# Allegro board OSC.brd
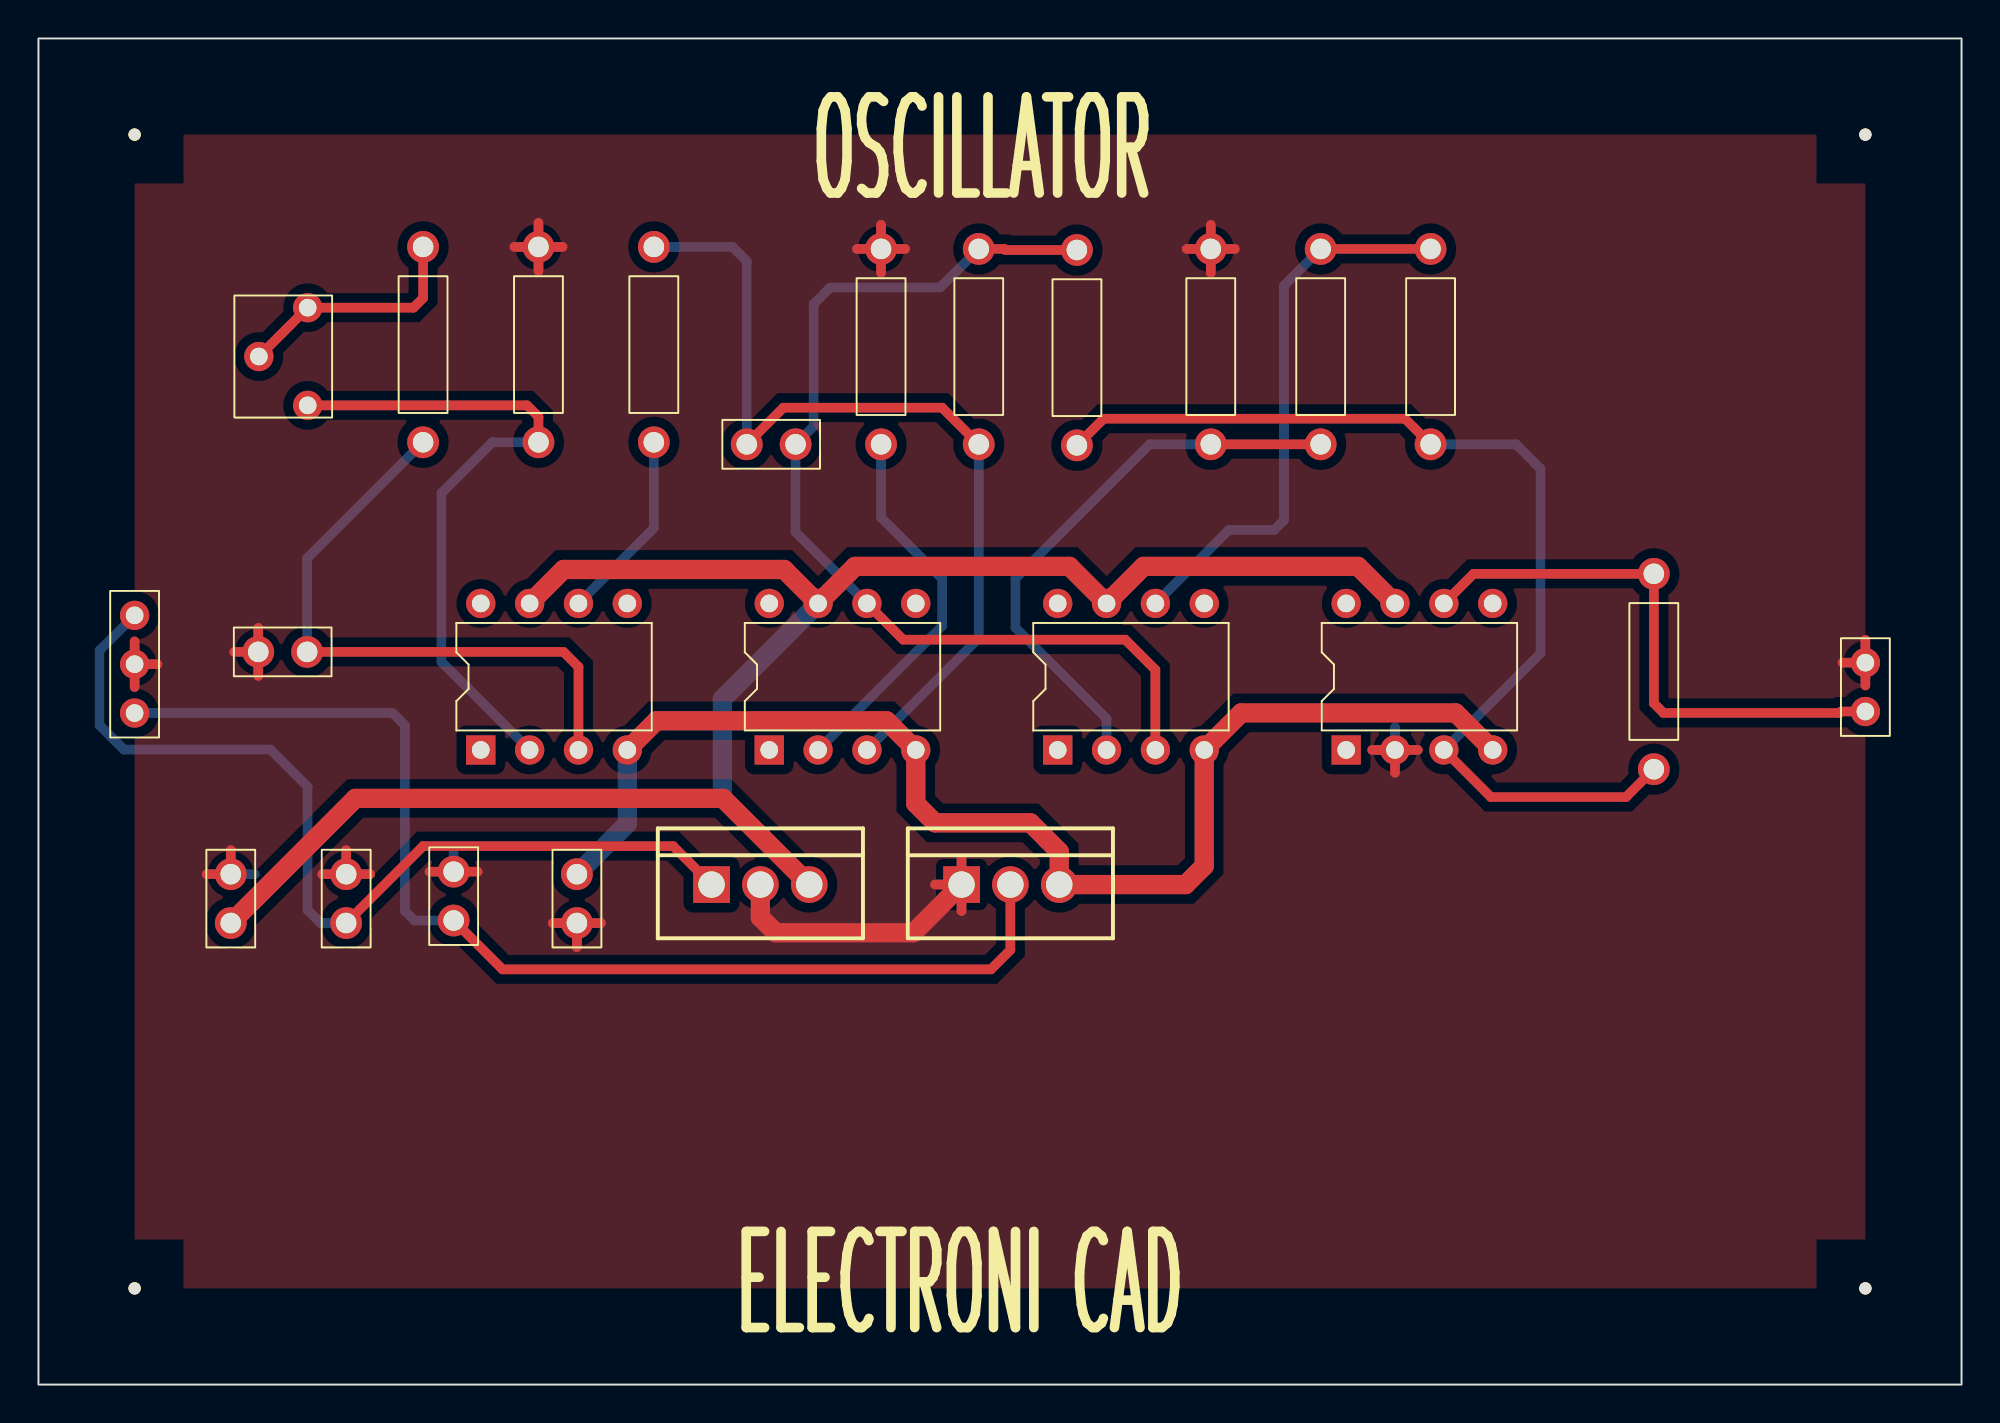
[diagram p0: board, top side]
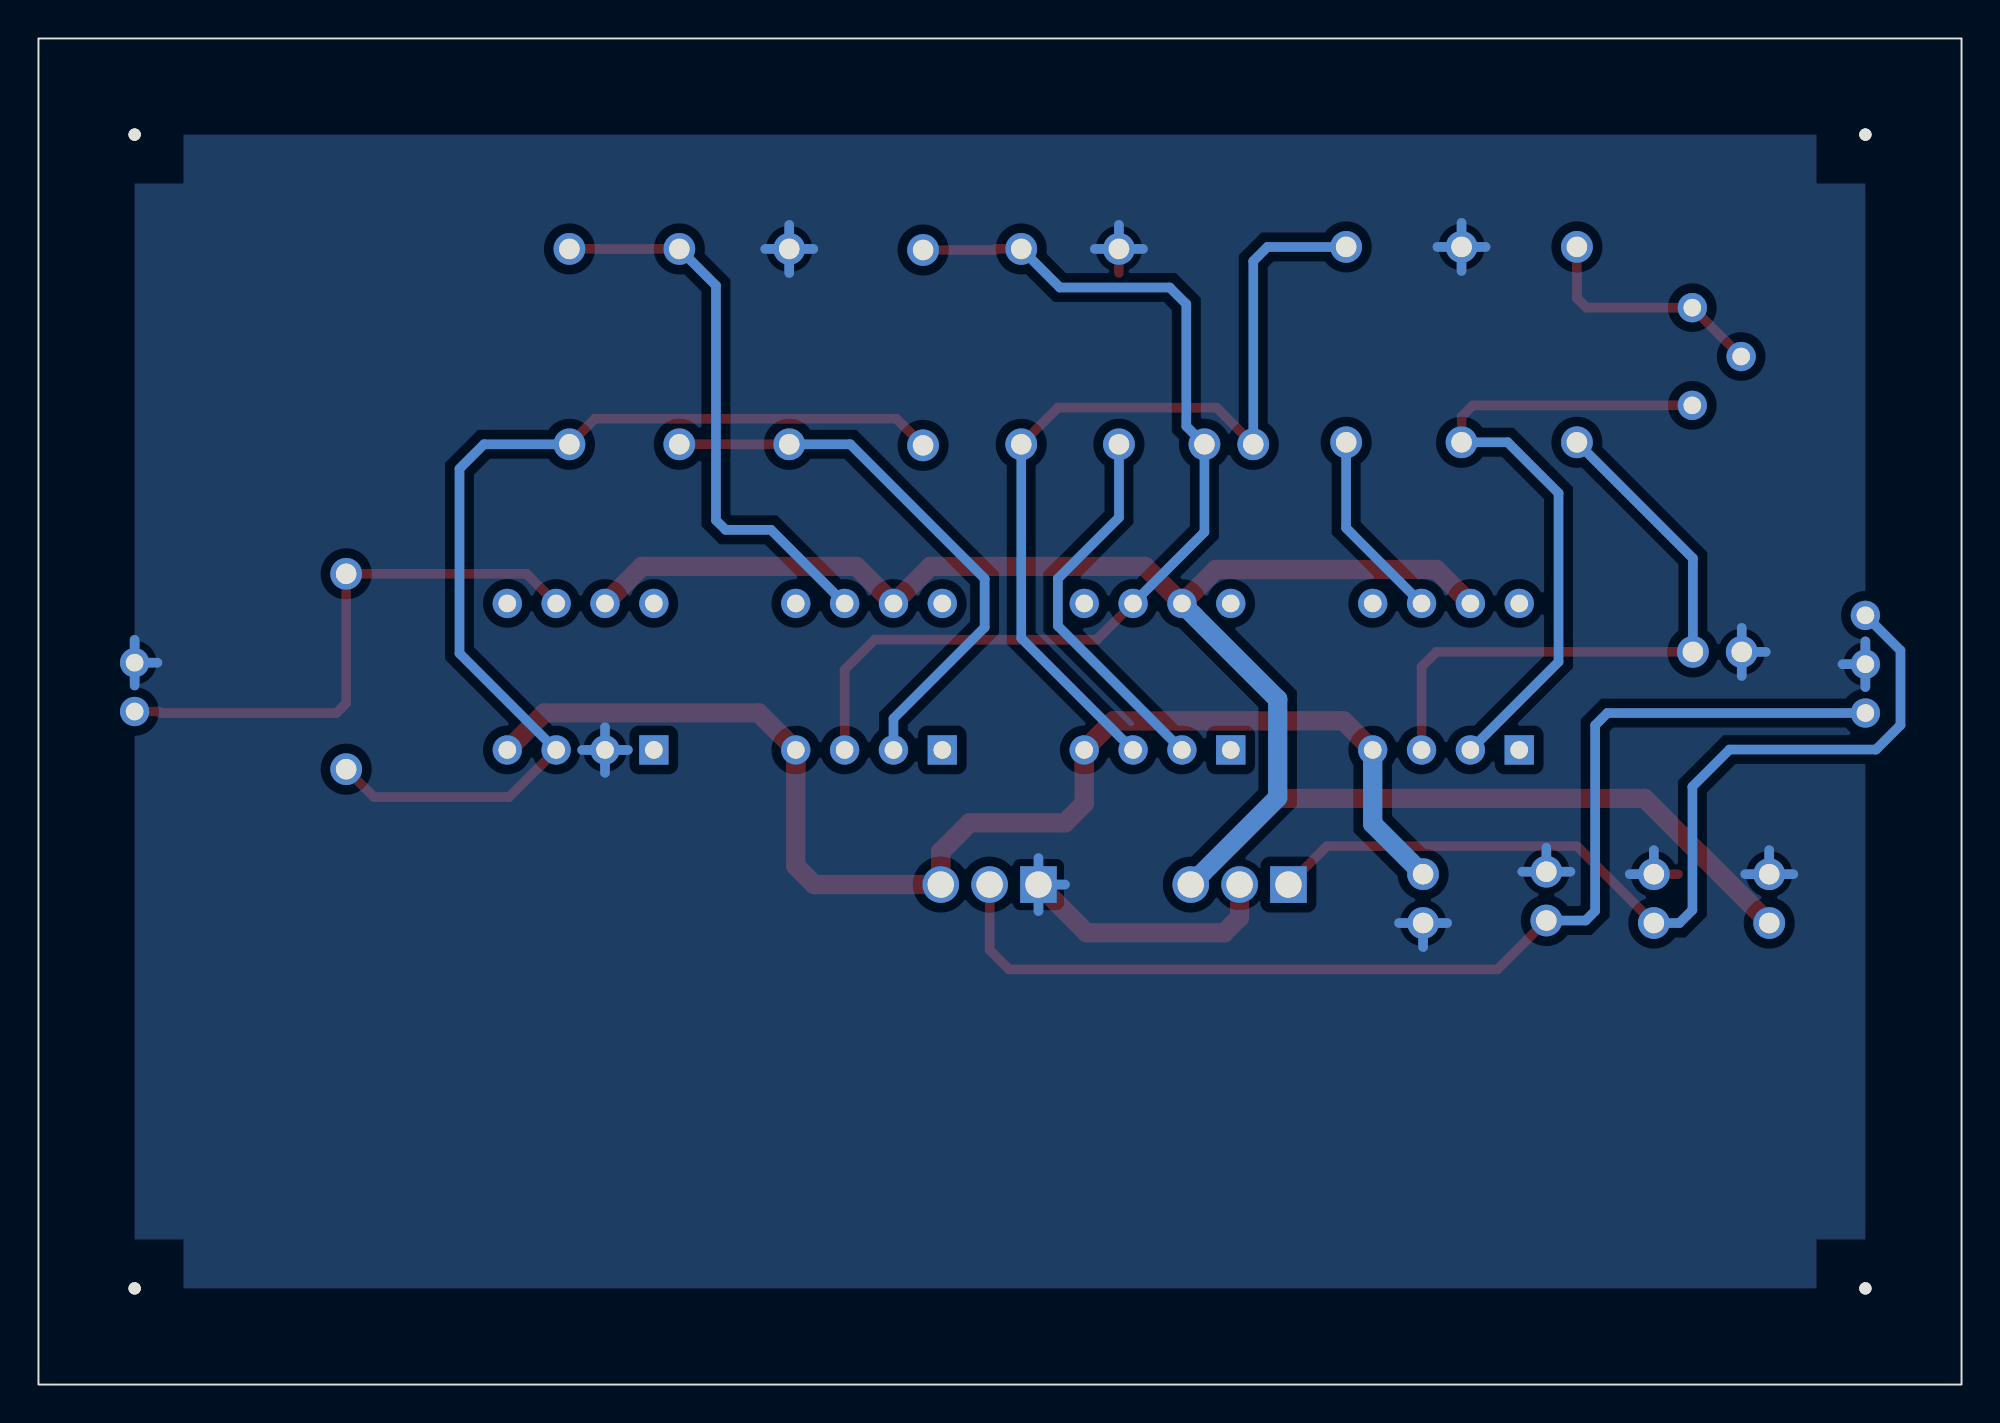
[diagram p1: board, bottom side, seen from below]

Outline 100 x 70 mm; copper layers: TOP, BOTTOM. Coordinates in mm from the lower left corner of the outline.
Outline path: rectangle 0,0 100,70

## Design rules (mm)
constraint set DEFAULT: min track width 0.5
nets with their own width: min track width 1; nets +VCC -VCC GND

## Placement (name value [footprint] x y rotation side)
C1  0.001uF  [CAPCK05]  36.83 48.9 270 top
C2  270pF  [CAPCK05]  13.97 38.1 90 top
C3  0.1uF  [CAPCK05]  16 24 0 top
C4  0.1uF  [CAPCK05]  10 24 0 top
C5  0.1uF  [CAPCK05]  21.59 26.67 180 top
C6  0.1uF  [CAPCK05]  28 24 0 top
J1  CON2  [JUMPER2]  95 35 90 top
J2  CON3  [JUMPER3]  5 40 270 top
NOREF  -  [unnamed]  5 65 0 top
NOREF#2  -  [unnamed]  95 65 0 top
NOREF#3  -  [unnamed]  5 5 0 top
NOREF#4  -  [unnamed]  95 5 0 top
R1  10K  [RES400]  20 49 0 top
R2  100K  [RES400]  48.9 48.9 0 top
R3  10K  [RES400]  54 59 180 top
R4  10K  [RES400]  84 32 0 top
R5  62K  [RES400]  32 49 0 top
R6  10K  [RES400]  43.81 48.9 0 top
R7  10K  [RES400]  72.39 59.05 180 top
R8  10K  [RES400]  26 49 0 top
R9  10K  [RES400]  66.67 48.9 0 top
R10  10K  [RES400]  60.96 48.9 0 top
U1  LF351  [DIP8_3]  23 33 90 top
U2  LF351  [DIP8_3]  38 33 90 top
U3  LF351  [DIP8_3]  53 33 90 top
U4  LF351  [DIP8_3]  68 33 90 top
U5  LM7812/TO  [TO220AB]  35 26 0 top
U6  LM7912C  [TO220AB]  48 26 0 top
VR1  1M  [RESADJ]  14 56 0 top

## Library data of the parts
C1-C6 = CAP NP: Tolerance: ***; User Part Number: ***
J1 = CON2: User Part Number: ***
J2 = CON3: User Part Number: ***
R1-R10 = R: Tolerance: ***; User Part Number: ***
U1-U4 = LF351: Tolerance: ***; User Part Number: ***
U5 = LM7812/TO_5
U6 = LM7912C_2
VR1 = POT: Tolerance: ***; User Part Number: ***

## Footprints (pads in the part's own frame, mm; a bottom-side part is the same pattern mirrored in y, then rotated)
CAPCK05
  round 1.651 hole 1.067: 1(0,0) 2(0,2.54)
DIP8_3
  rect 1.524x1.524 hole 0.914: 1(0,0)
  round 1.524 hole 0.914: 2(0,-2.54) 3(0,-5.08) 4(0,-7.62) 5(7.62,-7.62) 6(7.62,-5.08) 7(7.62,-2.54) 8(7.62,0)
JUMPER2
  round 1.524 hole 0.914: 1(0,0) 2(2.54,0)
JUMPER3
  round 1.524 hole 0.914: 1(0,0) 2(2.54,0) 3(5.08,0)
RES400
  round 1.651 hole 1.067: 1(0,0) 2(0,10.16)
RESADJ
  round 1.524 hole 0.914: 1(0,0) 2(-2.54,-2.54) 3(0,-5.08)
TO220AB
  rect 1.905x1.905 hole 1.372: 1(0,0)
  round 1.905 hole 1.372: 2(2.54,0) 3(5.08,0)
unnamed
  round 0.635 hole 3.175 unplated: (0,0)

## Nets
+VCC: C4.1 U1.7 U2.7 U3.7 U4.7 U5.3(VOUT)
-VCC: C6.2 U1.4(V-) U2.4(V-) U3.4(V-) U4.4(V-) U6.3(VOUT)
GND: C2.2 C3.2 C4.2 C5.1 C6.1 J1.2 J2.2 R6.2 R8.2 R10.2 U4.2 U5.2 U6.1
OUT: J1.1 R4.2 U4.6
SIG: C1.2 R2.2 R3.1 U2.6 U3.3
N00236: C2.1 R1.1 U1.3
N00268: R1.2 VR1.1 VR1.2(WIPER)
N00402: R8.1 U1.2 VR1.3
N00756: R5.1 U1.6
N00764: C1.1 R2.1 R5.2 U2.3
N01234: R6.1 U2.2
N01408: R7.1 R9.2 U3.6
N01412: R3.2 R4.1 R7.2 U4.3
N01525: R9.1 R10.1 U3.2
N02090: C3.1 J2.1 U5.1
N02204: C5.2 J2.3 U6.2

Pads without a net: U1 1 5 8; U2 1 5 8; U3 1 5 8; U4 1 5 8

## Routing (per net, layer and track width the routed paths; a pad name or vN(x,y) marks a point on that pad's centre or on a via; arc(x,y) is an arc through that point)
+VCC: length 102.8
  TOP w1: U5.3 35.6,30.48 16.48,30.48 C4.1 ; U1.7 27.3,42.38 38.77,42.38 U2.7 42.47,42.55 53.62,42.55 U3.7 57.47,42.55 68.61,42.55 U4.7
  BOTTOM w1: U2.7 35.56,35.64 35.56,30.52 U5.3
-VCC: length 67.4
  TOP w1: U1.4 32.14,34.52 44.1,34.52 U2.4 45.62,30.21 46.62,29.21 51.58,29.21 53.08,27.71 U6.3 59.66,26 60.62,26.96 U3.4 62.55,34.92 73.69,34.92 U4.4
  BOTTOM w1: U1.4 30.62,29.16 C6.2
GND: length 107
  TOP w0.5: 20.34,26.67 C5.1 22.84,26.67 ; 42.56,59.05 R6.2 ; R6.2 45.07,59.05 ; R6.2 43.81,57.8 ; R6.2 43.81,60.31 ; U6.1 48,27.38 ; U6.1 46.62,26 ; U6.1 48,24.62 ; 8.75,26.54 C4.2 10,27.79 ; 70.54,31.81 U4.2 ; U4.2 71.73,33 ; U4.2 69.35,33 ; C3.2 16,27.79 ; C3.2 14.75,26.54 ; C3.2 17.25,26.54 ; R10.2 60.96,60.31 ; R10.2 60.96,57.8 ; R10.2 62.21,59.05 ; R10.2 59.71,59.05 ; 28,22.75 C6.1 ; C6.1 29.25,24 ; C6.1 26.75,24 ; R8.2 26,60.41 ; R8.2 26,57.91 ; R8.2 24.75,59.16 ; R8.2 27.25,59.16 ; J1.2 95,38.73 ; J1.2 93.81,37.54 ; J1.2 95,36.35 ; J2.2 6.19,37.46 ; J2.2 5,36.27 ; J2.2 5,38.65 ; C2.2 11.43,39.35 ; C2.2 10.18,38.1 ; C2.2 11.43,36.85
  TOP w1: U5.2 37.54,24.29 38.34,23.5 45.49,23.5 U6.1
  BOTTOM w0.5: 46.62,26 U6.1 ; U6.1 48,27.38 ; U6.1 48,24.62 ; R8.2 26,60.41 ; R8.2 27.25,59.16 ; R8.2 26,57.91 ; R8.2 24.75,59.16 ; R6.2 43.81,60.31 ; R6.2 45.07,59.05 ; R6.2 42.56,59.05 ; 26.75,24 C6.1 ; C6.1 29.25,24 ; C6.1 28,22.75 ; J2.2 6.19,37.46 ; J2.2 5,38.65 ; J2.2 5,36.27 ; C2.2 11.43,39.35 ; C2.2 10.18,38.1 ; C2.2 11.43,36.85 ; C5.1 22.84,26.67 ; C5.1 21.59,27.92 ; C5.1 20.34,26.67 ; 95,36.35 J1.2 ; J1.2 93.81,37.54 ; J1.2 95,38.73 ; C4.2 10,27.79 ; C4.2 11.25,26.54 ; C4.2 8.75,26.54 ; R10.2 62.21,59.05 ; R10.2 59.71,59.05 ; R10.2 60.96,60.31 ; R10.2 60.96,57.8 ; U4.2 71.73,33 ; U4.2 69.35,33 ; U4.2 70.54,31.81 ; U4.2 70.54,34.19 ; 17.25,26.54 C3.2 16,27.79
OUT: length 29.5
  TOP w0.5: J1.1 93.73,35 93.66,34.92 84.5,34.92 84,35.43 R4.2 74.62,42.16 U4.6
SIG: length 53
  TOP w0.5: U3.3 58.08,37.17 56.52,38.73 44.97,38.73 U2.6 ; R2.2 50.23,59.05 50.28,59 R3.1
  BOTTOM w0.5: R2.2 46.89,57.05 41.17,57.05 40.31,56.19 40.31,49.84 C1.2 39.37,44.33 U2.6
N00236: length 32.2
  TOP w0.5: C2.1 27.3,38.1 28.08,37.32 U1.3
  BOTTOM w0.5: R1.1 13.97,42.97 C2.1
N00268: length 12.5
  TOP w0.5: R1.2 20,56.5 19.5,56 VR1.1 VR1.2
N00402: length 35
  TOP w0.5: VR1.3 25.41,50.92 26,50.33 R8.1
  BOTTOM w0.5: R8.1 23.6,49 20.95,46.35 20.95,37.59 U1.2
N00756: length 10
  BOTTOM w0.5: U1.6 32,44.54 R5.1
N00764: length 46.6
  TOP w0.5: R2.1 46.99,50.8 38.73,50.8 C1.1
  BOTTOM w0.5: R5.2 36.09,59.16 36.83,58.42 C1.1 ; U2.3 48.9,38.81 R2.1
N01234: length 19.9
  BOTTOM w0.5: R6.1 43.81,45.09 46.99,41.91 46.99,39.45 U2.2
N01408: length 29.1
  TOP w0.5: R9.2 R7.1
  BOTTOM w0.5: U3.6 61.91,44.45 64.27,44.45 64.77,44.95 64.77,57.15 R9.2
N01412: length 55
  TOP w0.5: U4.3 75.53,30.55 82.55,30.55 R4.1 ; 72.39,48.9 71.06,50.23 55.38,50.23 R3.2
  BOTTOM w0.5: 72.39,48.9 76.83,48.9 78.11,47.62 78.11,38.02 U4.3
N01525: length 29.6
  TOP w0.5: R10.1 R9.1
  BOTTOM w0.5: R10.1 57.78,48.9 50.8,41.91 50.8,39.37 55.54,34.63 U3.2
N02090: length 48.8
  TOP w0.5: C3.1 20,28 33,28 U5.1
  BOTTOM w0.5: J2.1 3.17,38.17 3.17,34.29 4.45,33.02 12.07,33.02 13.99,31.09 13.99,24.68 14.67,24 C3.1
N02204: length 60.5
  TOP w0.5: C5.2 24.13,21.59 49.53,21.59 50.54,22.6 U6.2
  BOTTOM w0.5: C5.2 19.55,24.13 19.05,24.63 19.05,34.29 18.42,34.92 J2.3

## Copper pours and planes (outline as drawn; the poured copper is in the pictures)
GND on TOP: 5,5 5,65 95,65 95,5 ; 2 cut-outs
GND on BOTTOM: 5,5 5,65 95,65 95,5 ; 1 cut-out

## Text on the board
Ref Des/Silkscreen Top: ELECTRONI CAD | OSCILLATOR
DEVICE_TYPE_TOP: FIGURE | FINISHED_SIZE | 0.914 | 1.067 | 1.372 | 3.175 | DRILL CHART: TOP to BOTTOM | ALL UNITS ARE IN MILLIMETERS | PLATED | NON-PLATED | QTY | 40 | 32 | 6 | 4
